# EAGLE board RocMan (EAGLE 9.6.2)
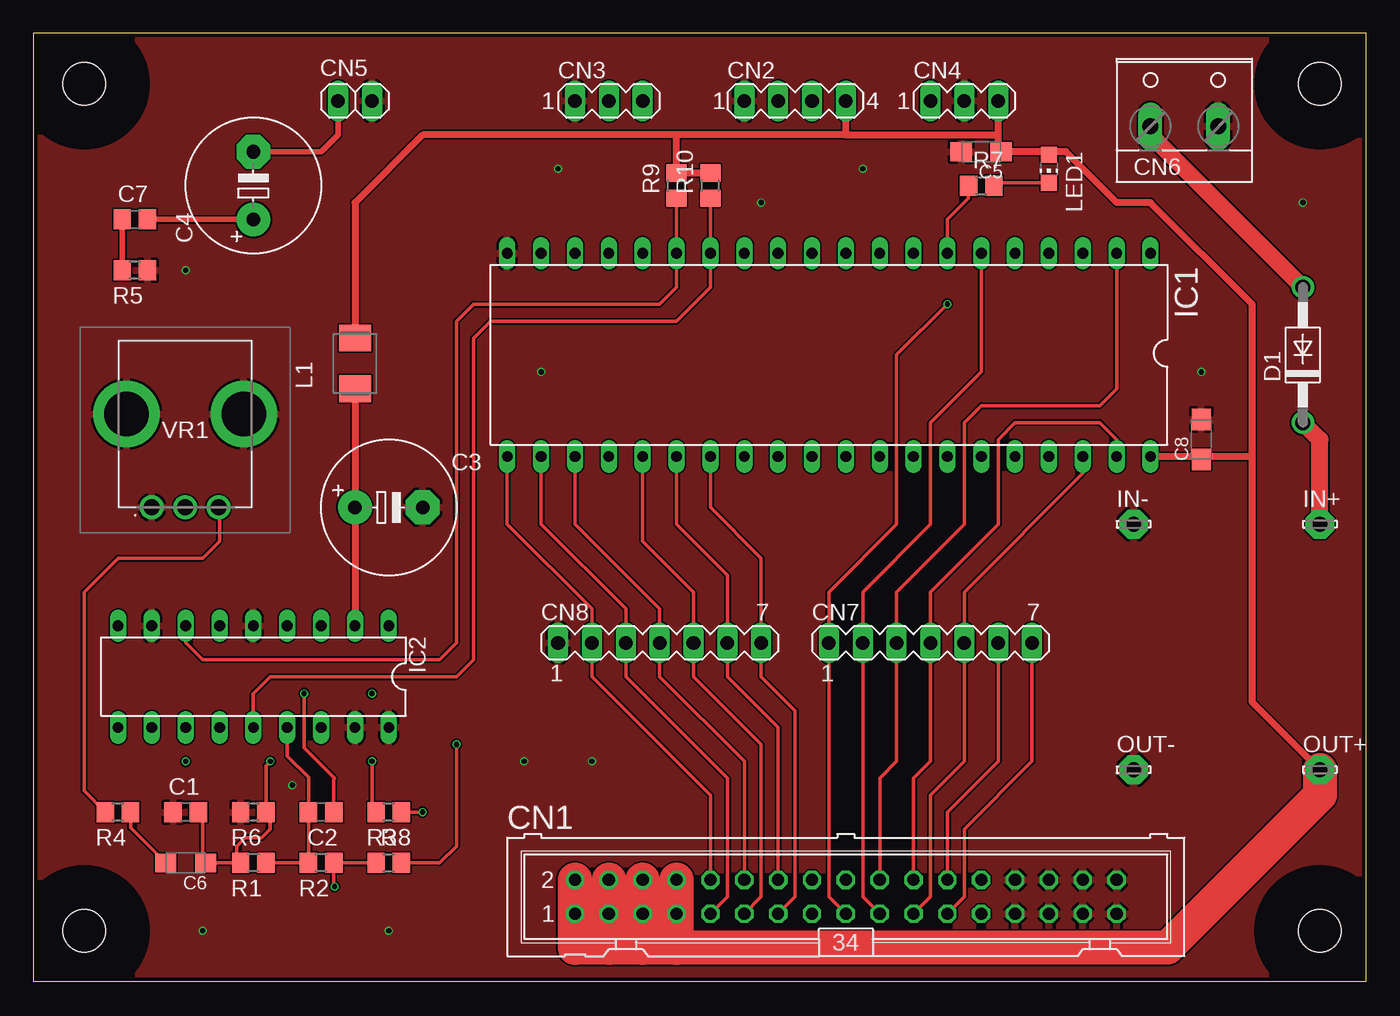
[diagram p0: board, top side]
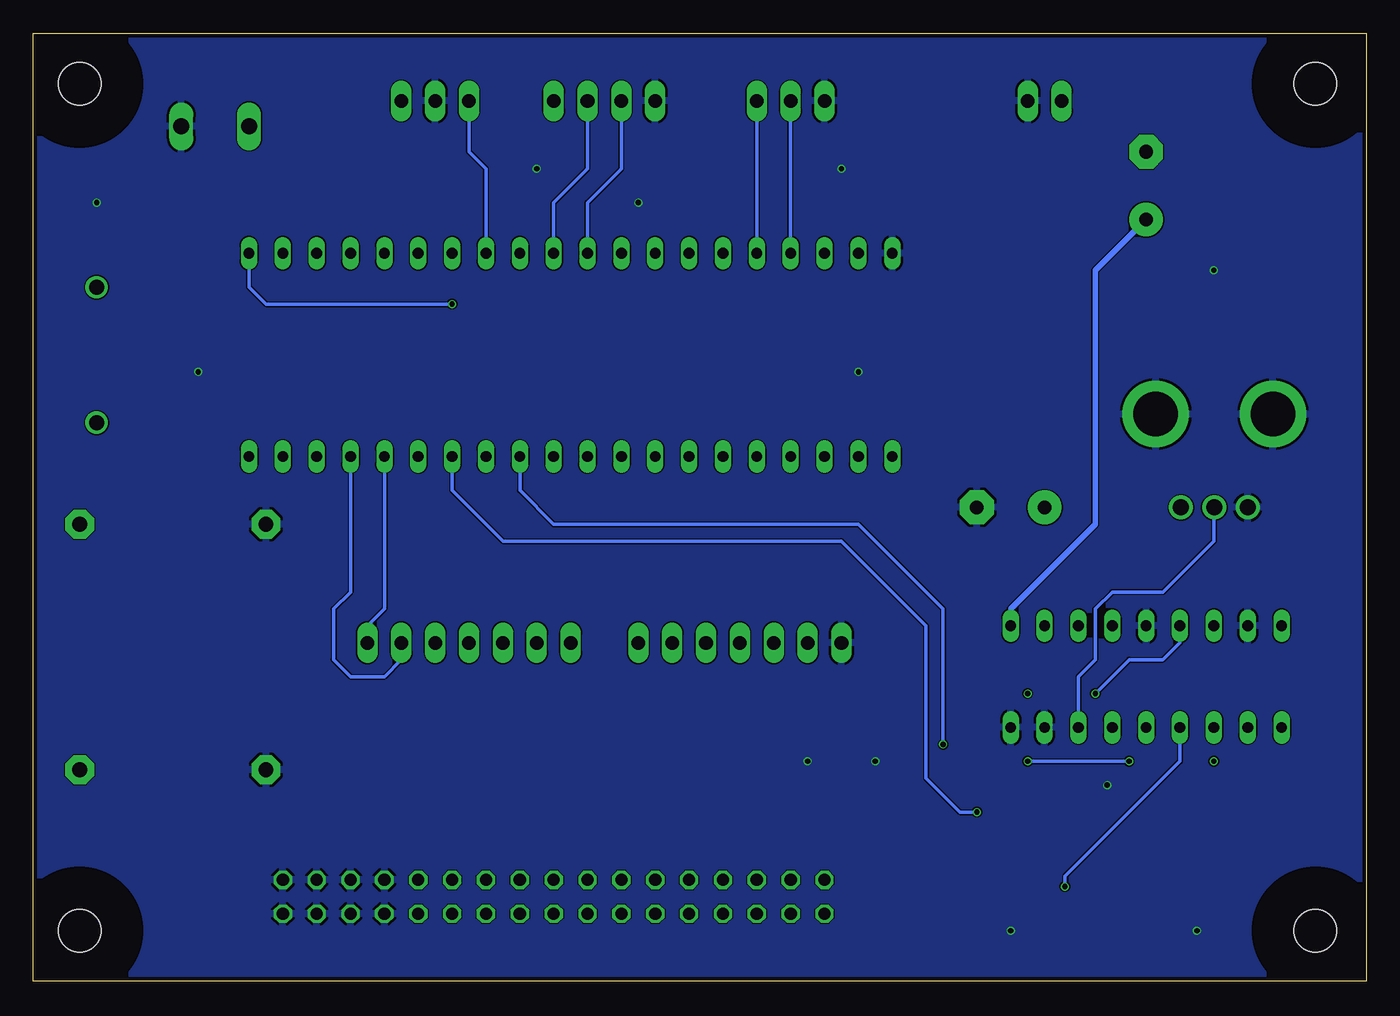
[diagram p1: board, bottom side, seen from below]

Size 100 x 71.11 mm. Coordinates in mm from the lower left corner, seen from the top.
Outline: 0,0 100,0 100,71.11 0,71.11 0,0
Copper layers (1*16): Top 0.035mm / dielectric 1.5mm / Bottom 0.035mm
Design rules "PCBWay_2L_100um-Track": minimum track width 0.1mm, minimum drill 0.3mm, track to track 0.1mm, track to pad 0.1mm, pad to pad 0.1mm, via to via 0.1mm, smd to smd 0mil, copper to edge 0.3mm, drill to drill 10mil, minimum pad ring 6mil, minimum via ring 0.1mm, stop-mask expansion 2mil, vias tented up to drill 0.45mm, thermal gap 0.2mm
Holes 3.2 mm at 3.81,67.31 3.81,3.81 96.52,3.81 96.52,67.31
tRestrict: area -0.8,-0.8 to 8.4,8.4; area 91.9,-0.8 to 101.1,8.4; area 91.9,62.7 to 101.1,71.9; area -0.8,62.7 to 8.4,71.9
bRestrict: area -0.8,-0.8 to 8.4,8.4; area 91.9,-0.8 to 101.1,8.4; area -0.8,62.7 to 8.4,71.9; area 91.9,62.7 to 101.1,71.9

## Footprints (pad centres in the part's own frame; a part is rotated, then mirrored left to right if it is on the bottom)
C0805 = smd 1.3 x 1.5: 1 -0.95,0; 2 0.95,0
E5-10,5 = drill 1.016 pad 2.54: + -2.54,0 | drill 1.016 pad 2.54 octagon: - 2.54,0
SMC_A = smd 1.6 x 1.4: + -1.5,0; - 1.5,0
ML34 = drill 0.914 octagon: 1 -20.32,-1.27; 2 -20.32,1.27; 3 -17.78,-1.27; 4 -17.78,1.27; 5 -15.24,-1.27; 6 -15.24,1.27; 7 -12.7,-1.27; 8 -12.7,1.27; 9 -10.16,-1.27; 10 -10.16,1.27; 11 -7.62,-1.27; 12 -7.62,1.27; 13 -5.08,-1.27; 14 -5.08,1.27; 15 -2.54,-1.27; 16 -2.54,1.27; 17 0,-1.27; 18 0,1.27; 19 2.54,-1.27; 20 2.54,1.27; 21 5.08,-1.27; 22 5.08,1.27; 23 7.62,-1.27; 24 7.62,1.27; 25 10.16,-1.27; 26 10.16,1.27; 27 12.7,-1.27; 28 12.7,1.27; 29 15.24,-1.27; 30 15.24,1.27; 31 17.78,-1.27; 32 17.78,1.27; 33 20.32,-1.27; 34 20.32,1.27
MA04-1 = drill 1.016 long: 1 -3.81,0; 2 -1.27,0; 3 1.27,0; 4 3.81,0
MA03-1 = drill 1.016 long: 1 -2.54,0; 2 0,0; 3 2.54,0
1X02 = drill 1.016 long: 1 -1.27,0; 2 1.27,0
W237-132 = drill 1.194 long: 1 -2.54,-0.635; 2 2.54,-0.635
MA07-1 = drill 1.016 long: 1 -7.62,0; 2 -5.08,0; 3 -2.54,0; 4 0,0; 5 2.54,0; 6 5.08,0; 7 7.62,0
DO41-10 = drill 1.118: A 5.08,0; C -5.08,0
DIL40 = drill 0.813 long: 1 -24.13,-7.62; 2 -21.59,-7.62; 3 -19.05,-7.62; 4 -16.51,-7.62; 5 -13.97,-7.62; 6 -11.43,-7.62; 7 -8.89,-7.62; 8 -6.35,-7.62; 9 -3.81,-7.62; 10 -1.27,-7.62; 11 1.27,-7.62; 12 3.81,-7.62; 13 6.35,-7.62; 14 8.89,-7.62; 15 11.43,-7.62; 16 13.97,-7.62; 17 16.51,-7.62; 18 19.05,-7.62; 19 21.59,-7.62; 20 24.13,-7.62; 21 24.13,7.62; 22 21.59,7.62; 23 19.05,7.62; 24 16.51,7.62; 25 13.97,7.62; 26 11.43,7.62; 27 8.89,7.62; 28 6.35,7.62; 29 3.81,7.62; 30 1.27,7.62; 31 -1.27,7.62; 32 -3.81,7.62; 33 -6.35,7.62; 34 -8.89,7.62; 35 -11.43,7.62; 36 -13.97,7.62; 37 -16.51,7.62; 38 -19.05,7.62; 39 -21.59,7.62; 40 -24.13,7.62
DIL18 = drill 0.813 long: 1 -10.16,-3.81; 2 -7.62,-3.81; 3 -5.08,-3.81; 4 -2.54,-3.81; 5 0,-3.81; 6 2.54,-3.81; 7 5.08,-3.81; 8 7.62,-3.81; 9 10.16,-3.81; 10 10.16,3.81; 11 7.62,3.81; 12 5.08,3.81; 13 2.54,3.81; 14 0,3.81; 15 -2.54,3.81; 16 -5.08,3.81; 17 -7.62,3.81; 18 -10.16,3.81
LSP11 = drill 1.118 pad 2.159 octagon: MP 0,0
L4532M = smd 2 x 2.4: 1 -1.9,0; 2 1.9,0
CHIP-LED0805 = smd 1.2 x 1.2: A 0,-1.05; C 0,1.05
R0805 = smd 1.3 x 1.5: 1 -0.95,0; 2 0.95,0
PTV09A4015FA103 = drill 1.2 pad 1.8: 1 0,0; 2 2.5,0; 3 5,0 | drill 3.32 pad 4.98: MH1 -1.9,7; MH2 6.9,7

## Placement (x,y rotation side)
C1  100n  [C0805]  11.43,12.7 0 top
C2  22n  [C0805]  21.59,12.7 180 top
C3  470μ  [E5-10,5]  26.67,35.56 0 top
C4  470μ  [E5-10,5]  16.51,59.69 90 top
C5  2.2μ  [SMC_A]  71.12,62.23 180 top
C6  1μ  [SMC_A]  11.43,8.89 180 top
C7  47n  [C0805]  7.62,57.15 0 top
C8  10μ  [SMC_A]  87.63,40.64 90 top
CN1  [ML34]  60.96,6.35 0 top
CN2  [MA04-1]  57.15,66.04 0 top
CN3  [MA03-1]  43.18,66.04 0 top
CN4  [MA03-1]  69.85,66.04 0 top
CN5  [1X02]  24.13,66.04 0 top
CN6  [W237-132]  86.36,64.77 0 top
CN7  [MA07-1]  67.31,25.4 0 top
CN8  [MA07-1]  46.99,25.4 0 top
D1  1N4001  [DO41-10]  95.25,46.99 90 top
IC1  STC8A8K64D4-BRKOUT  [DIL40]  59.69,46.99 180 top
IC2  [DIL18]  16.51,22.86 180 top
IN+  LSP11  [LSP11]  96.52,34.29 0 top
IN-  LSP11  [LSP11]  82.55,34.29 0 top
L1  33μH  [L4532M]  24.13,46.36 90 top
LED1  [CHIP-LED0805]  76.2,60.96 180 top
OUT+  LSP11  [LSP11]  96.52,15.88 0 top
OUT-  LSP11  [LSP11]  82.55,15.88 0 top
R1  10k  [R0805]  16.51,8.89 180 top
R2  2.7k  [R0805]  21.59,8.89 180 top
R3  12k  [R0805]  26.67,12.7 180 top
R4  4.7k  [R0805]  6.35,12.7 180 top
R5  2R2  [R0805]  7.62,53.34 180 top
R6  470R  [R0805]  16.51,12.7 180 top
R7  1k  [R0805]  71.12,59.69 0 top
R8  2.2k  [R0805]  26.67,8.89 0 top
R9  22k  [R0805]  48.26,59.69 90 top
R10  22k  [R0805]  50.8,59.69 90 top
VR1  10k  [PTV09A4015FA103]  8.89,35.56 0 top

## Library data of the parts
C1-C8 = rcl; SPICEPREFIX: C
CN1 = con-harting-ml; OC_FARNELL: unknown; OC_NEWARK: unknown
CN2-CN4 CN7 CN8 = con-lstb; OC_FARNELL: unknown; OC_NEWARK: unknown
CN5 = pinhead
CN6 = con-wago-508; OC_FARNELL: unknown; OC_NEWARK: unknown
D1 = diode
IC1 = stc-omat
IC2 = omat-muut
IN+ IN- OUT+ OUT- = solpad
L1 = rcl; SPICEPREFIX: L
LED1 = led
R1-R10 = rcl; SPICEPREFIX: R
VR1 = omat-muut; DESCRIPTION: Potentiometers 10K AUDIO 20%; HEIGHT: 15.5mm; MANUFACTURER_NAME: Bourns; MANUFACTURER_PART_NUMBER: PTV09A-4015F-A103; MOUSER_PART_NUMBER: 652-PTV09A-4015FA103; MOUSER_PRICE-STOCK: https://www.mouser.co.uk/ProductDetail/Bourns/PTV09A-4015F-A103?qs=Qzws7J6gxqwyx8aBn%2Flmmw%3D%3D

## Nets
+5V: C5.+ C8.+ CN1.1 CN1.2 CN1.3 CN1.4 CN1.5 CN1.6 CN1.7 CN1.8 CN2.4 CN4.3 IC1.40 L1.2 LED1.A OUT+.MP R9.2 R10.2
A0: CN1.22 CN7.4 IC1.39
A1: CN1.21 CN7.5 IC1.38
A2: CN1.24 CN7.6 IC1.37
A3: CN1.23 CN7.7 IC1.36
CH1: IC1.34 R3.1
CH2: IC1.32 R8.2
DB1: CN1.12 CN8.4 IC1.23
DB2: CN1.13 CN8.7 IC1.27
DCLK: CN1.17 CN7.1 IC1.1
DG1: CN1.9 CN8.3 IC1.22
DG2: CN1.14 CN8.6 IC1.26
DR1: CN1.10 CN8.2 IC1.21
DR2: CN1.11 CN8.5 IC1.25
FILT: IC1.15 IC2.7 R9.1
GCLK: CN1.19 CN7.2 IC1.6
GND: C1.1 C3.- C5.- C8.- CN1.27 CN1.28 CN1.29 CN1.30 CN1.31 CN1.32 CN1.33 CN1.34 CN2.1 CN3.1 CN4.2 CN5.2 CN6.2 CN8.1 IC1.20 IC2.5 IC2.8 IC2.17 IC2.18 IN-.MP OUT-.MP R5.1 R6.2 VR1.1 VR1.MH1 VR1.MH2
IR: CN4.1 IC1.8
LE: CN1.20 CN7.3 IC1.2
LEVEL: IC1.14 IC2.14 R10.1
N$1: C2.2 IC2.15 R1.1 R2.2
N$2: C1.2 C6.+ R1.2 R3.2 R6.1
N$3: C2.1 IC2.6
N$4: C6.- R4.1
N$5: R4.2 VR1.3
N$6: IC2.13 R2.1 R8.1
N$7: IC2.16 VR1.2
N$8: C3.+ IC2.2 L1.1
N$9: CN6.1 D1.A
N$10: C4.+ C7.2 IC2.1
N$11: C4.- CN5.1
N$12: D1.C IN+.MP
N$13: C7.1 R5.2
N$14: IC1.7 R7.1
N$15: LED1.C R7.2
RXD: CN2.3 IC1.10
TP1: CN3.2 IC1.17
TP2: CN3.3 IC1.16
TXD: CN2.2 IC1.11

## Tracks (layer width: path | path; a pad name or v marks a point on that pad's centre or on a via)
+5V
  Top 0.508: OUT+.MP 91.44,20.95 91.44,39.37 | 91.44,39.37 87.86,39.37 C8.+ 87.4,39.37 IC1.40 | 91.44,39.37 91.44,50.8 83.82,58.42 81.28,58.42 77.47,62.23 76.42,62.23 LED1.A 75.98,62.23 C5.+ 72.39,62.46 72.39,63.5 | 72.39,63.5 CN4.3 | 60.96,63.5 CN2.4 | 60.96,63.5 72.39,63.5 | 60.96,63.5 48.26,63.5 | 48.26,63.5 29.21,63.5 24.13,58.42 L1.2 | R10.2 R9.2 48.26,63.5 | CN1.8 CN1.7 CN1.5 CN1.3 CN1.1
  Top 2.54: OUT+.MP 96.52,13.97 85.09,2.54 48.26,2.54 45.72,2.54 43.18,2.54 40.64,2.54
  Top 2.6: 40.64,2.54 CN1.1 CN1.2 | CN1.4 CN1.3 43.18,2.54 | CN1.6 CN1.5 45.72,2.54 | CN1.8 48.26,2.54
A0
  Top 0.254: IC1.39 81.28,40.64 80.01,41.91 73.66,41.91 72.39,40.64 72.39,34.29 67.31,29.21 CN7.4 67.31,16.51 66.04,15.24 CN1.22
A1
  Top 0.254: IC1.38 78.74,38.1 69.85,29.21 CN7.5 69.85,16.51 67.31,13.97 67.31,6.35 CN1.21
A2
  Top 0.254: CN7.6 72.39,16.51 68.58,12.7 CN1.24
  Bottom 0.254: IC1.37 76.2,29.21 77.47,27.94 77.47,24.13 76.2,22.86 73.66,22.86 72.39,24.13 CN7.6
A3
  Top 0.254: CN7.7 74.93,16.51 69.85,11.43 69.85,6.35 CN1.23
  Bottom 0.254: IC1.36 73.66,27.94 74.93,26.67 CN7.7
CH1  (via drill 0.4)
  Top 0.254: v29.21,12.7 R3.1
  Bottom 0.254: IC1.34 68.58,36.83 64.77,33.02 39.37,33.02 33.02,26.67 33.02,15.24 30.48,12.7 v29.21,12.7
CH2  (via drill 0.4)
  Top 0.254: v31.75,17.78 31.75,10.16 30.48,8.89 R8.2
  Bottom 0.254: IC1.32 63.5,36.83 60.96,34.29 38.1,34.29 31.75,27.94 v31.75,17.78
DB1
  Top 0.254: IC1.23 40.64,34.29 46.99,27.94 CN8.4 46.99,22.86 53.34,16.51 CN1.12
DB2
  Top 0.254: IC1.27 50.8,35.56 54.61,31.75 CN8.7 54.61,22.86 57.15,20.32 57.15,6.35 CN1.13
DCLK  (via drill 0.4)
  Top 0.254: v68.58,50.8 64.77,46.99 64.77,34.29 59.69,29.21 CN7.1 59.69,6.35 CN1.17
  Bottom 0.254: IC1.1 83.82,52.07 82.55,50.8 v68.58,50.8
DG1
  Top 0.254: IC1.22 38.1,34.29 44.45,27.94 CN8.3 44.45,22.86 52.07,15.24 52.07,6.35 CN1.9
DG2
  Top 0.254: IC1.26 48.26,34.29 52.07,30.48 CN8.6 52.07,22.86 55.88,19.05 CN1.14
DR1
  Top 0.254: IC1.21 35.56,34.29 41.91,27.94 CN8.2 41.91,22.86 50.8,13.97 CN1.10
DR2
  Top 0.254: IC1.25 45.72,33.02 49.53,29.21 CN8.5 49.53,22.86 54.61,17.78 54.61,6.35 CN1.11
FILT
  Top 0.254: IC2.7 11.43,25.4 12.7,24.13 30.48,24.13 31.75,25.4 31.75,49.53 33.02,50.8 46.99,50.8 48.26,52.07 IC1.15 R9.1
GCLK
  Top 0.254: IC1.6 71.12,45.72 67.31,41.91 67.31,34.29 62.23,29.21 CN7.2 62.23,6.35 CN1.19
GND  (via drill 0.4)
  other vias: 36.83,16.51 41.91,16.51 26.67,3.81 12.7,3.81 11.43,53.34 87.63,45.72 95.25,58.42 19.43,14.73 62.23,60.96 39.37,60.96 54.61,58.42 38.1,45.72
  pour Bottom: -1.27,72.39 101.6,72.39 101.6,-1.27 -1.27,-1.27
  pour Top (isolate 0.127): -1.27,72.39 101.6,72.39 101.6,-1.27 -1.27,-1.27
IR
  Bottom 0.254: CN4.1 67.31,62.23 66.04,60.96 IC1.8
LE
  Top 0.254: IC1.2 81.28,44.45 80.01,43.18 71.12,43.18 69.85,41.91 69.85,34.29 64.77,29.21 CN7.3 64.77,16.51 63.5,15.24 CN1.20
LEVEL
  Top 0.254: IC2.14 16.51,21.59 17.78,22.86 31.75,22.86 33.02,24.13 33.02,48.26 34.29,49.53 48.26,49.53 50.8,52.07 IC1.14 R10.1
N$1
  Top 0.254: IC2.15 19.05,16.89 20.64,15.3 C2.2 R2.2 R1.1
N$2  (via drill 0.4)
  Top 0.254: R3.2 25.4,13.02 v25.4,16.51 | v17.78,16.51 17.46,16.19 R6.1 17.78,12.38 17.78,11.43 17.14,10.79 15.88,10.79 15.24,10.16 15.24,9.21 R1.2 C6.+ 12.7,9.12 12.7,12.38 C1.2
  Bottom 0.254: v25.4,16.51 v17.78,16.51
N$3  (via drill 0.4)
  Top 0.254: C2.1 22.54,15.17 22.61,15.24 20.32,17.53 v20.32,21.59
  Bottom 0.254: v20.32,21.59 17.78,24.13 15.24,24.13 13.97,25.4 IC2.6
N$4
  Top 0.254: C6.- 7.3,11.52 R4.1
N$5
  Top 0.254: R4.2 3.81,14.29 3.81,29.21 6.35,31.75 12.7,31.75 13.97,33.02 13.97,35.48 VR1.3
N$6  (via drill 0.4)
  Top 0.254: v22.61,7.11 22.54,7.18 R2.1 R8.1
  Bottom 0.254: v22.61,7.11 22.61,7.87 13.97,16.51 IC2.13
N$7
  Bottom 0.254: VR1.2 11.43,35.52 11.43,33.02 15.24,29.21 19.05,29.21 20.32,27.94 20.32,24.13 21.59,22.86 IC2.16
N$8
  Top 0.508: L1.1 C3.+ IC2.2
N$9
  Top 1.27: D1.A 83.82,63.5 CN6.1
N$10
  Top 0.406: C7.2 C4.+
  Bottom 0.406: IC2.1 26.67,27.94 20.32,34.29 20.32,53.34 C4.+
N$11
  Top 0.406: CN5.1 22.86,63.5 21.59,62.23 C4.-
N$12
  Top 1.27: IN+.MP 96.52,40.64 D1.C
N$13
  Top 0.406: C7.1 R5.2
N$14
  Top 0.254: IC1.7 68.58,57.15 70.17,58.74 R7.1
N$15
  Top 0.254: R7.2 72.29,59.91 LED1.C
N$20  (via drill 0.4)
  other vias: 25.4,21.59
N$21  (via drill 0.4)
  other vias: 11.43,16.51
RXD
  Bottom 0.254: IC1.10 60.96,58.42 58.42,60.96 CN2.3
TP1
  Bottom 0.254: IC1.17 CN3.2
TP2
  Bottom 0.254: IC1.16 CN3.3
TXD
  Bottom 0.254: IC1.11 58.42,58.42 55.88,60.96 CN2.2

## Text on the board
tValues: SPKR | + | - | GND | TP1 | TP2 | GND | TXD | RXD | +5V | IR | GND | +5V | + | + | LED | 9...24V | Rocman / 210325 | + | GND | DB2 | DCLK | GCLK | A3 | IN- | IN+ | DR1 | DG1 | DB1 | DR2 | DG2 | LE | A0 | A1 | A2 | LM389 | OUT- | OUT+